# Altium PCB Backplane_PCB_v2.PcbDoc (part 2 of 2)
Units mm, origin at the board's own origin, x right, y up, seen from the top; angles counter-clockwise.
Board outline 92.34 x 177.99 mm, 4 copper layers (Top Layer, Signal Layer 1, Internal Plane 1, Bottom Layer), stack 1.47 mm thick; 65 components, 43 nets, 464 pads, 71 vias.
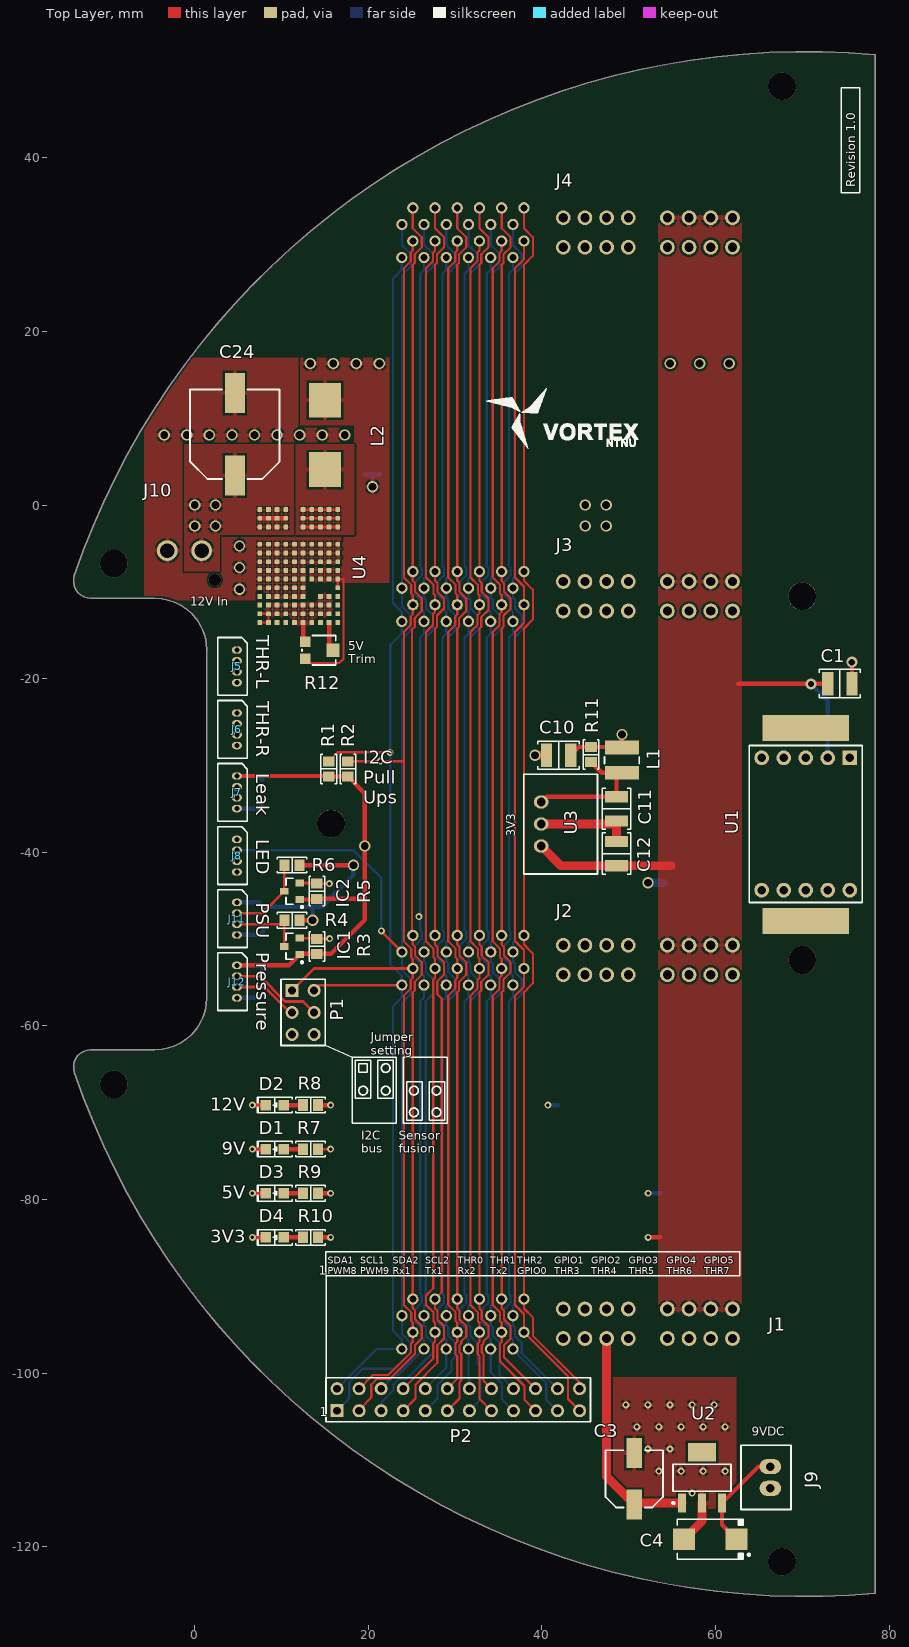
[diagram p0: Top Layer view]

## Via types
v1: diameter 1.3, hole 0.9, Top Layer to Bottom Layer, 34 vias
v2: diameter 0.8, hole 0.4, Top Layer to Bottom Layer, 34 vias
v3: diameter 1.27, hole 0.711, Top Layer to Bottom Layer, 2 vias
v4: diameter 1.4, hole 1.4, Top Layer to Bottom Layer, 1 vias

## Nets (pads, with @x,y where several pads share a name; then routed paths per layer and width w, separated by ;. In a path a pad name is that pad's centre, name@x,y a point inside that pad or via, vN(x,y) a via of type N, cw(c..) or ccw(c..) an arc to the next point about the centre after c; other vN are vias at no path point) (continued)
THR4: (continued)
  Bottom Layer w0.254: J4.9 34.096,27.099 33.652,26.655 33.652,-7.049 33.837,-7.234 33.837,-8.088 33.075,-8.85 33.075,-10.292 33.881,-11.098 33.881,-12.096 34.096,-12.311 34.096,-14.811 33.652,-15.255 33.652,-48.959 33.837,-49.144 33.837,-49.998 33.075,-50.76 33.075,-52.202 33.881,-53.008 33.881,-54.006 34.096,-54.221 34.096,-56.721 33.652,-57.165 33.652,-90.869 33.837,-91.054 33.837,-91.908 33.075,-92.67 33.075,-94.112 33.881,-94.918 33.881,-95.916 34.096,-96.131 J1.9 34.096,-99.896 35.4,-101.2 35.4,-103.02 P2.17
THR5: J1.10 J2.10 J3.10 J4.10 J6.2 P2.19 | length 176.5
  Top Layer w0.254: J4.10 35.366,29.329 35.127,29.09 35.127,28.092 34.335,27.3 34.335,-8.342 35.181,-9.188 35.181,-10.186 35.366,-10.371 35.366,-12.297 35.127,-12.536 35.127,-13.818 34.335,-14.61 34.335,-50.252 35.181,-51.098 35.181,-52.096 35.366,-52.281 35.366,-54.207 35.127,-54.446 35.127,-55.728 34.335,-56.52 34.335,-92.162 35.181,-93.008 35.181,-94.006 35.366,-94.191 J1.10 35.366,-96.401 35.171,-96.596 35.171,-98.652 38,-101.481 38,-103.08 P2.19
  Signal Layer 1 w0.305: J6.2 23.777,-25.204 35.366,-13.615 J3.10
THR6: J1.11 J2.11 J3.11 J4.11 J6.3 P2.21 | length 175.4
  Signal Layer 1 w0.305: J6.3 23.593,-26.454 J3.11
  Bottom Layer w0.254: J4.11 36.656,27.099 36.212,26.655 36.212,-7.049 36.397,-7.234 36.397,-8.088 35.635,-8.85 35.635,-10.292 36.441,-11.098 36.441,-12.096 36.656,-12.311 36.656,-14.811 36.212,-15.255 36.212,-48.959 36.397,-49.144 36.397,-49.998 35.635,-50.76 35.635,-52.202 36.441,-53.008 36.441,-54.006 36.656,-54.221 36.656,-56.721 36.212,-57.165 36.212,-90.869 36.397,-91.054 36.397,-91.908 35.635,-92.67 35.635,-94.112 36.441,-94.918 36.441,-95.916 36.656,-96.131 J1.11 37.011,-97.211 37.233,-97.433 37.233,-97.875 40.5,-101.142 40.5,-103.04 P2.21
THR7: J1.12 J2.12 J3.12 J4.12 J6.4 P2.23 | length 181
  Top Layer w0.254: J4.12 37.926,28.331 36.895,27.3 36.895,-8.342 37.926,-9.373 37.926,-13.579 36.895,-14.61 36.895,-50.23 37.926,-51.261 37.926,-55.489 36.895,-56.52 36.895,-92.162 37.926,-93.193 J1.12 43,-100.375 43,-103 P2.23
  Signal Layer 1 w0.305: J6.4 21.703,-27.704 22.448,-26.959 24.582,-26.959 37.926,-13.615 J3.12
Tx1: J1.16 J2.16 J3.16 J4.16 P2.7 | length 144
  Top Layer w0.254: P2.7 25.429,-102.931 25.429,-101.332 27.945,-98.816 27.945,-96.784 28.717,-96.012 28.717,-94.58 27.955,-93.818 27.955,-92.82 27.686,-92.551 J1.16 28.463,-90.704 28.463,-56.85 27.945,-56.332 27.945,-54.874 28.717,-54.102 28.717,-52.67 27.955,-51.908 27.955,-50.91 27.686,-50.641 27.686,-14.221 27.901,-14.006 27.901,-12.724 28.717,-11.908 28.717,-10.76 27.955,-9.998 27.955,-9 27.686,-8.731 27.686,27.689 27.901,27.904 27.901,28.902 28.717,29.718 28.717,30.856 27.686,31.887 J4.16
Tx2: J1.18 J2.18 J3.18 J4.18 P2.11 | length 142.6
  Top Layer w0.254: P2.11 30.5,-102.94 30.5,-101.042 30.7,-100.842 30.7,-97.833 30.505,-97.638 30.505,-96.784 30.7,-96.589 30.7,-96.332 31.277,-95.755 31.277,-94.58 30.515,-93.818 30.515,-92.82 30.246,-92.551 J1.18 30.246,-56.131 30.461,-55.916 30.461,-54.918 31.277,-54.102 31.277,-52.676 31.28,-52.673 30.515,-51.908 30.515,-50.91 30.246,-50.641 30.246,-14.221 30.461,-14.006 30.461,-13.008 31.277,-12.192 31.277,-10.76 30.515,-9.998 30.515,-9 30.246,-8.731 30.246,27.689 30.461,27.904 30.461,28.902 31.277,29.718 31.277,30.856 30.246,31.887 J4.18
pads on no net: J7.3 J8.1 J8.3 U1.3 U1.7 U1.8 U2.4 U4.ADR0 U4.ADR1 U4.EAO U4.EN U4.NC U4.PGD U4.SYNCO U4.TRK
copper on no net:
  other v4: 2.3,-8.645

## Polygon pours and split planes (outlines as drawn)
5V on Bottom Layer "Bottom Layer - 5V" (solid, pour order 2): 53.378,30.061 63.03,30.061 63.03,-96.431 53.378,-96.431
5V on Bottom Layer "Bottom Layer - 5V" (solid, pour order 24): -1.116,13.98 -1.116,16.98 22.384,16.98 22.384,13.98
GND on Bottom Layer "Bottom Layer - GND" (solid, pour order 28): 22.384,11.68 -5.816,11.68 -5.816,4.68 22.384,4.68
12V on Bottom Layer "Top Layer - 12V" (solid, pour order 22): 2.864,-7.6 2.864,-3.42 11.384,-3.42 11.384,2.4 -5.816,2.4 -5.816,-7.6
12V on Bottom Layer "Bottom Layer - 12V" (solid, pour order 6): 41.44,30.061 51.092,30.061 51.092,-96.431 41.44,-96.431
3V3 on Top Layer "Top Layer - 3V3" (solid, pour order 0): 53.378,33.453 63.03,33.453 63.03,-93.002 53.378,-93.002
GND on Top Layer "Top Layer - GND" (solid, remove dead copper, pour order 26): 12.184,16.98 12.184,9.18 18.384,9.18 18.384,7.005 -1.2,7.005 -1.2,-3.02 -5.816,-3.02 -5.816,16.98
5V on Top Layer "Top Layer - 5V" (solid, pour order 20): 12.184,15.48 12.184,9.18 18.384,9.18 18.384,-3.42 16.884,-3.42 16.884,-7.12 13.084,-7.12 13.084,-8.92 22.384,-8.92 22.384,16.98 12.184,16.98
NetR12_1 on Top Layer "Top Layer - SGND" (solid, pour order 18): 7.084,-11.12 14.084,-11.12 14.084,-10.12 15.984,-10.12 15.984,-13.92 7.084,-13.92
GND on Top Layer "Top Layer - GND" (solid, pour order 16): 16.884,-3.42 16.884,-6.92 12.886,-6.92 12.876,-10.946 -5.816,-10.946 -5.816,-3.02 -1.2,-3.02 -1.2,-7.6 2.864,-7.6 2.864,-3.42
NetL2_1 on Top Layer "Top Layer - VS1" (solid, pour order 14): 11.384,-3.42 11.384,7.005 18.384,7.005 18.384,-3.42
12V on Top Layer "Top Layer - 12V" (solid, pour order 12): 11.384,-3.42 11.384,7.005 -1.2,7.005 -1.2,-7.6 2.864,-7.6 2.864,-3.42
GND on Top Layer "Bottom Layer - GND - LDO" (solid, remove dead copper, pour order 10): 47.536,-115.608 62.395,-115.608 62.395,-100.495 47.536,-100.495
5V on Signal Layer 1 "Signal Layer - 5V" (solid, pour order 32): 12.2,17.8 63,17.8 63,14.9 12.2,14.9
12V on Signal Layer 1 "Signal Layer - 12V" (solid, pour order 30): -1.2,-3.8 -1.2,1.4 51.1,1.4 51.1,-3.8
GND on Internal Plane 1 (split plane): 177 vertices, not listed, extent -13.447,-125.223 77.874,51.741

## Keep-outs
Keep-Out Layer:
  the board outline again, w0.1

## Silkscreen, mask and mechanical layers (free items; w line width, h text height)
Top Overlay:
  drawing of 1253 lines, arcs and shapes, not listed
  text "Revision 1.0" at 76.1,36.6 h1 r90
  text "12V In" at -0.5,-11.6 h1
  text "THR-L" at 7.1,-15 h1.52 r270
  text "5V / Trim" at 17.7,-18.2 h1
  text "THR-R" at 7.1,-22.6 h1.52 r270
  text "Leak" at 7.1,-30.9 h1.52 r270
  text "I2C / Pull / Ups" at 19.4,-34.4 h1.52
  text "3V3" at 36.9,-38.2 h1 r90
  text "LED" at 7.1,-38.5 h1.52 r270
  text "PSU" at 7.1,-45.8 h1.52 r270
  text "Pressure" at 7.1,-51.5 h1.52 r270
  text "Jumper / setting" at 20.3,-63.3 h1
  text "12V" at 1.816,-69.761 h1.52
  text "I2C / bus" at 19.2,-74.6 h1
  text "Sensor / fusion" at 23.5,-74.62 h1
  text "9V" at 3.086,-74.841 h1.52
  text "5V" at 3.086,-79.921 h1.52
  text "3V3" at 1.816,-85.001 h1.52
  text "SDA1 / PWM8" at 15.3,-88.6 h0.8
  text "SCL1 / PWM9" at 19.045,-88.6 h0.8
  text "SDA2 / Rx1" at 22.791,-88.6 h0.8
  text "SCL2 / Tx1" at 26.536,-88.6 h0.8
  text "THR0 / Rx2" at 30.282,-88.6 h0.8
  text "THR1 / Tx2" at 34.027,-88.6 h0.8
  text "THR2 / GPIO0" at 37.173,-88.6 h0.8
  text "GPIO1 / THR3" at 41.418,-88.6 h0.8
  text "GPIO2 / THR4" at 45.664,-88.6 h0.8
  text "GPIO3 / THR5" at 50.009,-88.6 h0.8
  text "GPIO4 / THR6" at 54.355,-88.6 h0.8
  text "GPIO5 / THR7" at 58.7,-88.6 h0.8
  text "1" at 14.3,-88.7 h1
  text "1" at 14.4,-105 h1
  text "9VDC" at 64.2,-107.2 h1
Bottom Overlay:
  drawing of 5136 lines, arcs and shapes, not listed
  text "Designed by / Andreas Tesaker" at 76.7,50.6 h1 r90
Mechanical 1:
  lines w0.1: -13.958,-125.73 -13.958,52.245 78.385,52.245 78.385,-125.73 70.1,-125.73 -13.958,-125.73
  lines w0.2: 8.397,-100.495 78.397,-100.495 ; 8.397,27.013 78.397,27.013
Mechanical 2:
  the board outline again, w0.1